# Altium PCB Arduino MEGA blank shield.pcbdoc
Units mm, origin at the board's own origin, x right, y up, seen from the top; angles counter-clockwise.
Board outline 85.09 x 63.34 mm, 2 copper layers (Top Layer, Bottom Layer); 70 components, 89 nets, 224 pads, 0 vias.
Unrouted connection lines stored in the file: 1.
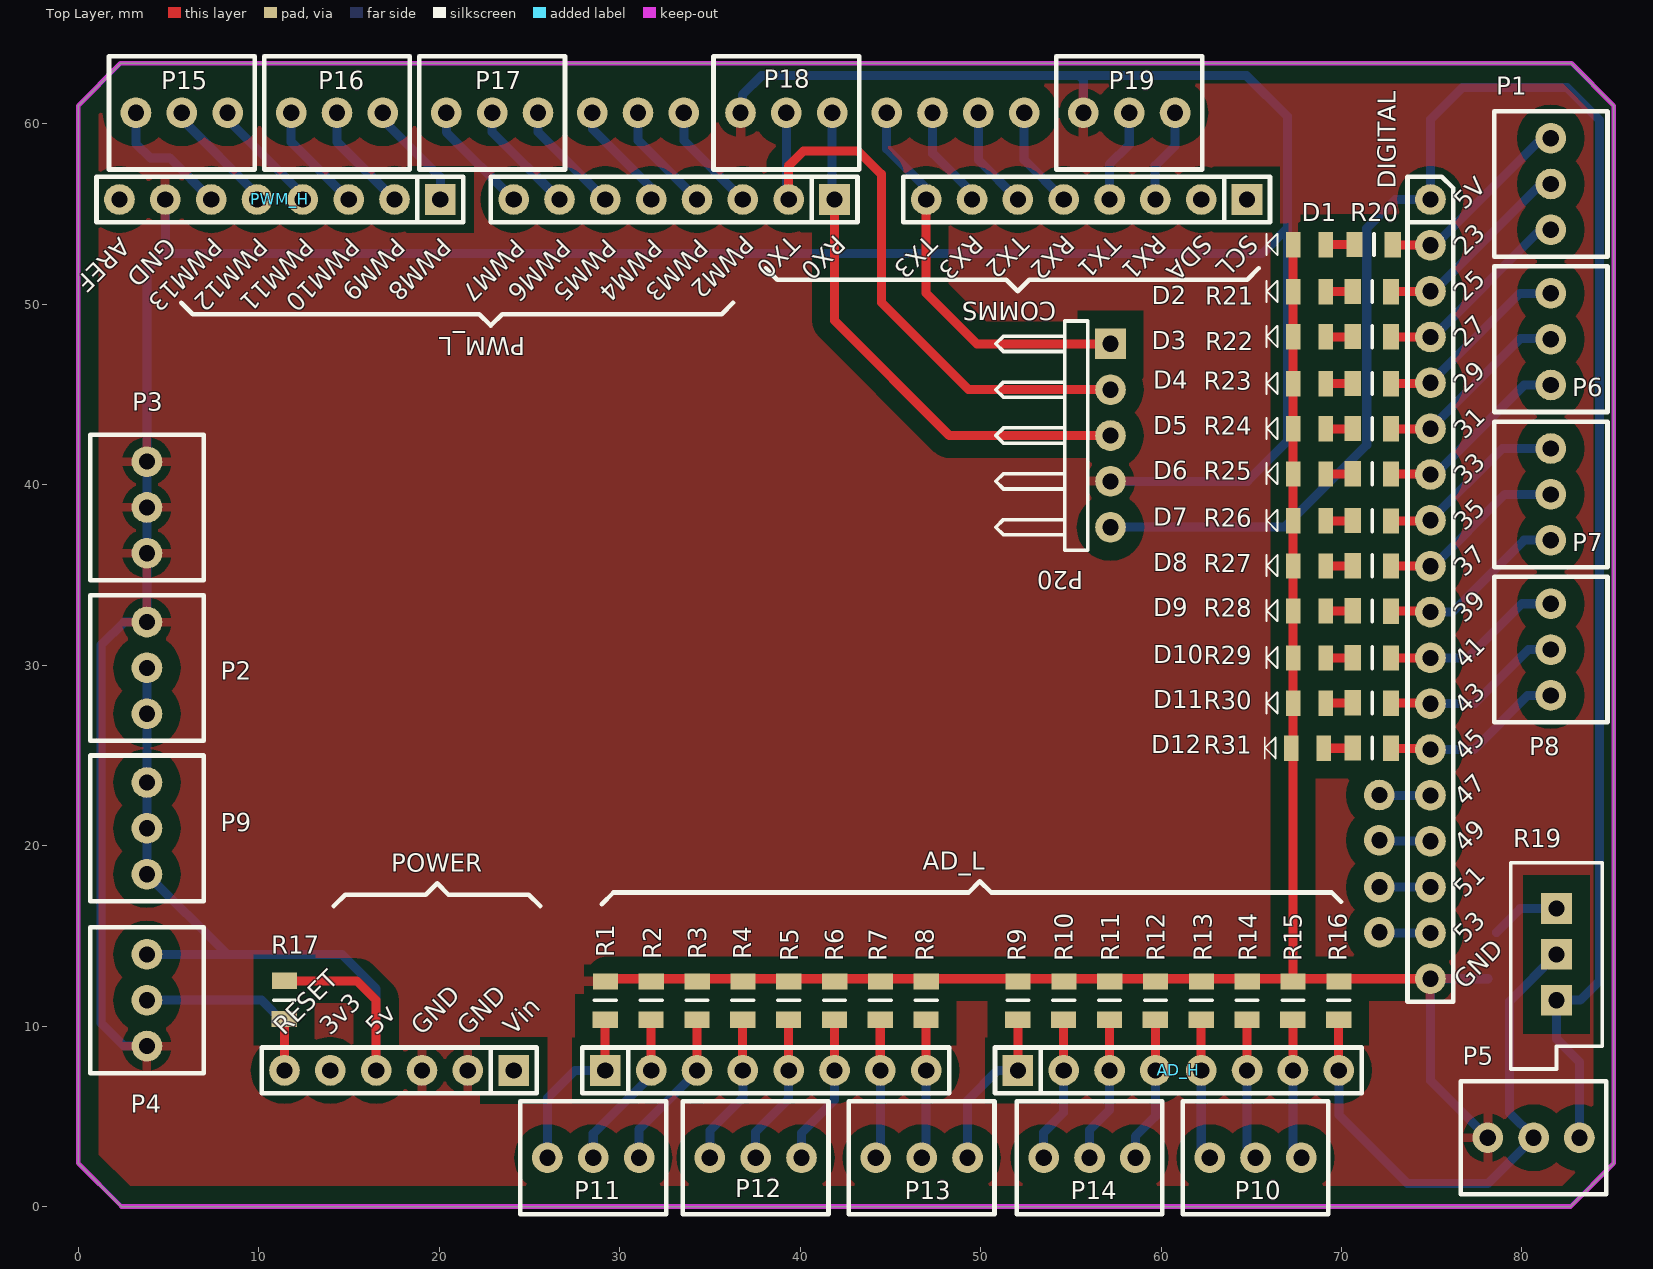
[diagram p0: Top Layer view]
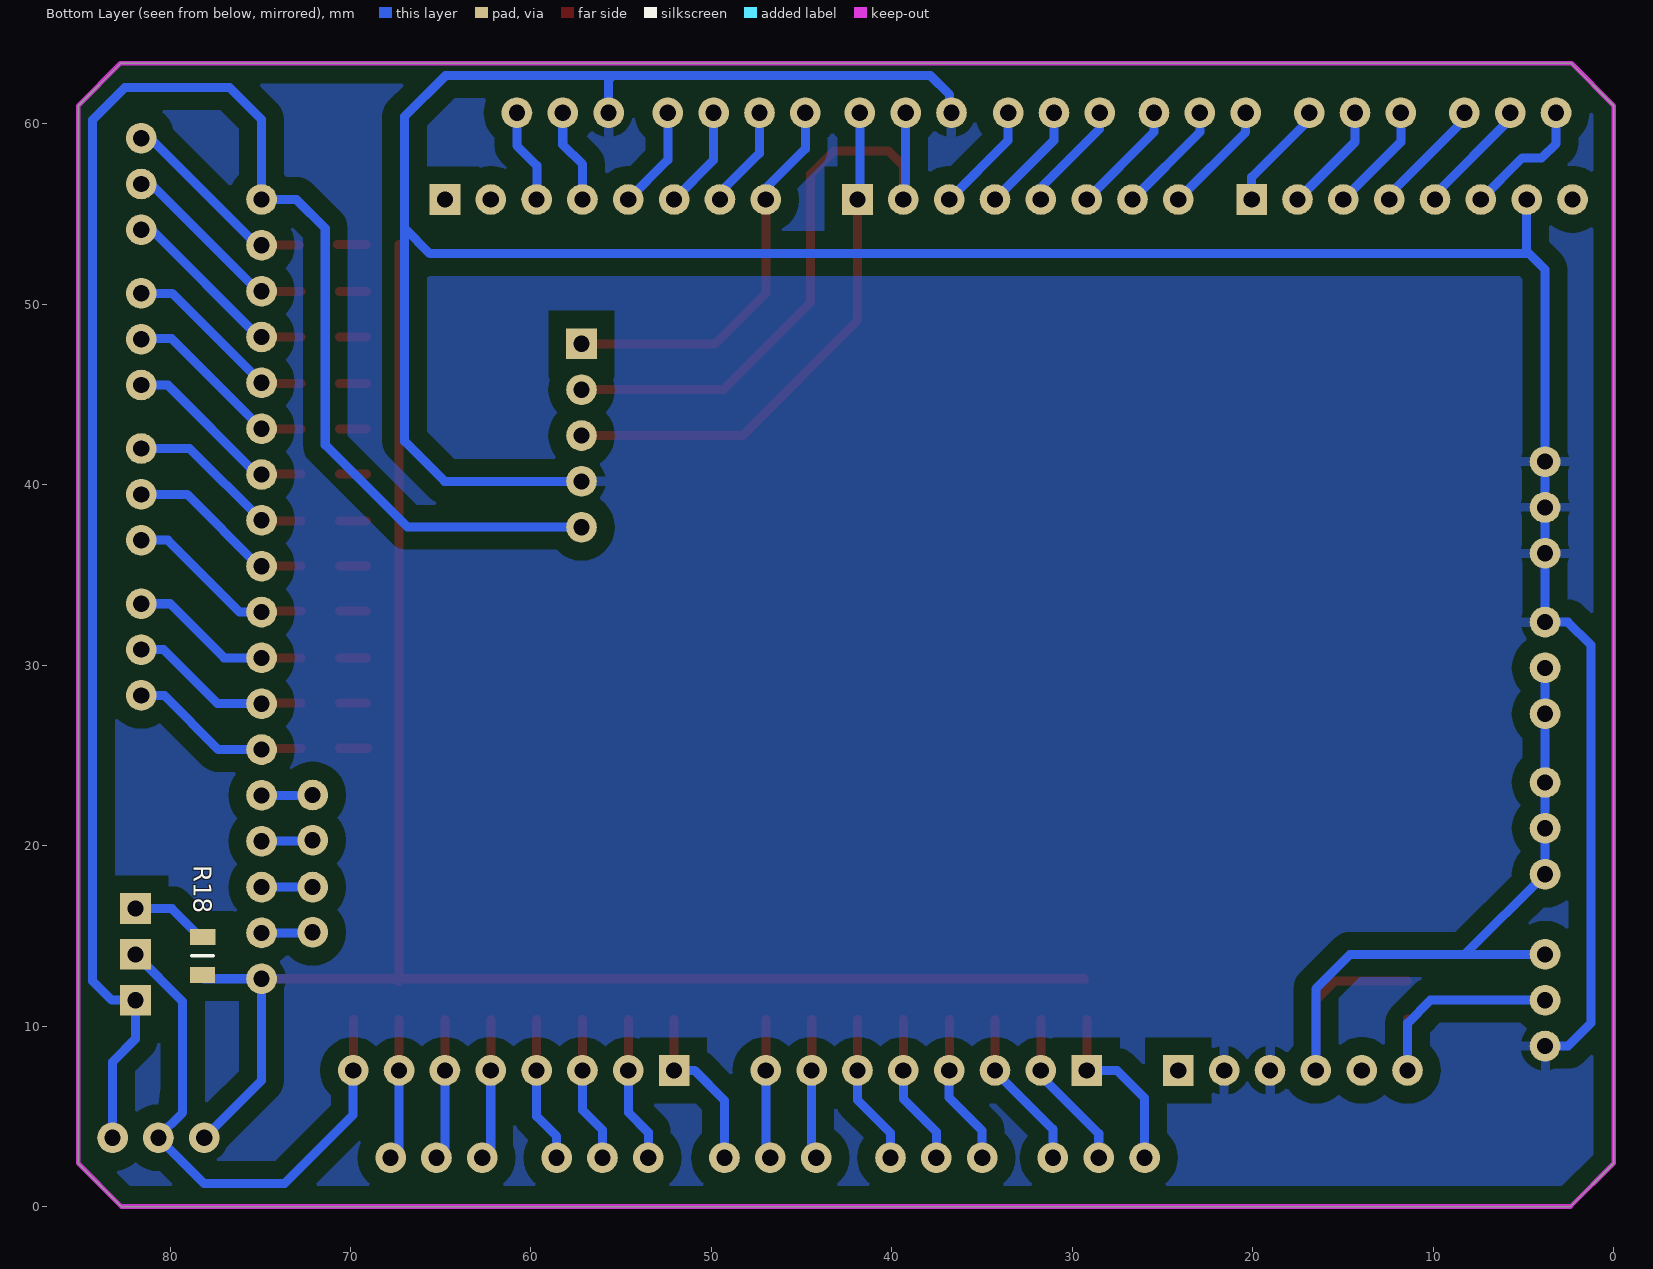
[diagram p1: Bottom Layer view, seen from below]

## Layer stack, top to bottom
Top Solder: solder mask 0.0102, Solder Resist, Dk 3.5
Top Layer: signal copper 0.0356
Dielectric1: dielectric 0.32, FR-4, Dk 4.8
Bottom Layer: signal copper 0.0356
Bottom Solder: solder mask 0.0102, Solder Resist, Dk 3.5

## Board outline
0,2.4 0,61 2.34,63.34 82.75,63.34 85.09,61 85.09,2.39 82.7,0 2.4,0

## Design rules (kind name [scope] priority, off if disabled: settings)
Clearance [All] p1: gap=0.3
PolygonConnect [All] p1: connectstyle=Relief reliefconductorwidth=0.5 reliefentries=4 polygonreliefangle="90 Angle" airgapwidth=0.5
RoutingVias [All] p1: holewidth=0.711 width=1.27 viastyle="Through Hole" minholewidth=0.711 minwidth=1.27 maxholewidth=0.711 maxwidth=1.27
SilkToSolderMaskClearance SilkscreenOverComponentPads [IsPad] p1: minsilkscreentomaskgap=0.254 clearancetoexposedcopper=TRUE
SolderMaskExpansion [All] p1: expansion=0.102
Width [All] p1: maxlimit=0.5 minlimit=0.3 preferedwidth=0.5
28 further rules are at their usual default settings.

## Components (designator, comment, footprint, x,y, rotation, side; value= is the part's Value field where it differs from the comment)
AD_H "AD_H" "HEADER 8X1 8.5MM" 52.07,7.54 r0 top locked
AD_L "AD_L" "HEADER 8X1 8.5MM" 29.21,7.54 r0 top locked
COMMS "Communication" "HEADER 8X1 8.5MM" 64.77,55.8 r180 top
D1 "LED0" LED0805 68.9,53.3 r180 top
D2 "LED0" LED0805 68.9,50.7 r180 top
D3 "LED0" LED0805 68.9,48.2 r180 top
D4 "LED0" LED0805 68.9,45.6 r180 top
D5 "LED0" LED0805 68.9,43.1 r180 top
D6 "LED0" LED0805 68.9,40.6 r180 top
D7 "LED0" LED0805 68.9,38 r180 top
D8 "LED0" LED0805 68.9,35.5 r180 top
D9 "LED0" LED0805 68.9,33 r180 top
D10 "LED0" LED0805 68.9,30.4 r180 top
D11 "LED0" LED0805 68.9,27.9 r180 top
D12 "LED0" LED0805 68.8,25.4 r180 top
DIGITAL "IO_36" "HEADER 36X 8MM" 74.93,55.8 r270 top
P1 "Header 3" DG307-2.54 81.6,59.2 r270 top
P2 "Header 3" DG307-2.54 3.81,27.305 r90 top
P3 "Header 3" DG307-2.54 3.81,41.275 r270 top
P4 "Header 3" DG307-2.54 3.81,13.97 r270 top
P5 "Header 3" DG307-2.54 83.185,3.81 r180 top
P6 "Header 3" DG307-2.54 81.6,50.6 r270 top
P7 "Header 3" DG307-2.54 81.6,42 r270 top
P8 "Header 3" DG307-2.54 81.6,33.4 r270 top
P9 "Header 3" DG307-2.54 3.81,23.495 r270 top
P10 "Header 3" DG307-2.54 62.7,2.7 r0 top
P11 "Header 3" DG307-2.54 26,2.7 r0 top
P12 "Header 3" DG307-2.54 35,2.7 r0 top
P13 "Header 3" DG307-2.54 44.2,2.7 r0 top
P14 "Header 3" DG307-2.54 53.5,2.7 r0 top
P15 "Header 3" DG307-2.54 3.2,60.6 r0 top
P16 "Header 3" DG307-2.54 11.8,60.6 r0 top
P17 "Header 3" DG307-2.54 20.4,60.6 r0 top
P18 "Header 3" DG307-2.54 36.7,60.6 r0 top
P19 "Header 3" DG307-2.54 55.7,60.6 r0 top
P20 "Header 5H" HDR1X5H 57.2,47.8 r270 top
POWER "POWER" "HEADER 6X1 8.5MM" 24.13,7.54 r180 top locked
PWM_H "PWM_H" "HEADER 8X1 8.5MM" 20.066,55.8 r180 top locked
PWM_L "PWM_L" "HEADER 8X1 8.5MM" 41.91,55.8 r180 top locked
R1 "100K" 6-0805_N 29.21,11.43 r270 top
R2 "100K" 6-0805_N 31.75,11.43 r270 top
R3 "100K" 6-0805_N 34.29,11.43 r270 top
R4 "100K" 6-0805_N 36.83,11.43 r270 top
R5 "100K" 6-0805_N 39.37,11.43 r270 top
R6 "100K" 6-0805_N 41.91,11.43 r270 top
R7 "100K" 6-0805_N 44.45,11.43 r270 top
R8 "100K" 6-0805_N 46.99,11.43 r270 top
R9 "100K" 6-0805_N 52.07,11.43 r270 top
R10 "100K" 6-0805_N 54.61,11.43 r270 top
R11 "100K" 6-0805_N 57.15,11.43 r270 top
R12 "100K" 6-0805_N 59.69,11.43 r270 top
R13 "100K" 6-0805_N 62.23,11.43 r270 top
R14 "100K" 6-0805_N 64.77,11.43 r270 top
R15 "100K" 6-0805_N 67.31,11.43 r270 top
R16 "100K" 6-0805_N 69.85,11.43 r270 top
R17 "100K" 6-0805_N 11.43,11.43 r90 top
R18 "0" 6-0805_N 78.2,13.9 r270 bottom
R19 "RPot" VR5 81.915,13.97 r270 top
R20 "1K" 6-0805_N 71.8,53.3 r180 top
R21 "1K" 6-0805_N 71.7,50.7 r180 top
R22 "1K" 6-0805_N 71.7,48.2 r180 top
R23 "1K" 6-0805_N 71.7,45.6 r180 top
R24 "1K" 6-0805_N 71.7,43.1 r180 top
R25 "1K" 6-0805_N 71.7,40.6 r180 top
R26 "1K" 6-0805_N 71.7,38 r180 top
R27 "1K" 6-0805_N 71.7,35.5 r180 top
R28 "1K" 6-0805_N 71.7,33 r180 top
R29 "1K" 6-0805_N 71.7,30.4 r180 top
R30 "1K" 6-0805_N 71.7,27.9 r180 top
R31 "1K" 6-0805_N 71.7,25.4 r180 top

## Footprints (in the part's own frame and the unit in brackets; to place one, negate y for a bottom-side part, rotate by r counter-clockwise, add the part's x,y. Pads: shape width x height; smd on the part's side, far side on the other; paste and mask are expansions set on the pad)
6-0805_N [mm] "Chip Resistor, Body 2.0x1.2mm, IPC Medium Density"
  rect 0.9x1.4 smd: 1(-1.039,0.009) 2(1.078,-0.007)
  silkscreen extent 0,-0.6 0,0.6, body extent -1.07,-0.7 1.07,0.7, height 0.7
DG307-2.54 [mm]
  round 1.7 hole 0.9: 1(0,0) 2(2.54,0) 3(5.08,0)
  silkscreen extent -1.5,-3.14 6.58,3.14
HDR1X5H [mm] "Connector; Header; 5 Position; Right Angle"
  rect 1.7x1.7 hole 0.9: 1(0,0)
  round 1.7 hole 0.9: 2(2.54,0) 3(5.08,0) 4(7.62,0) 5(10.16,0)
  silkscreen extent -1.27,-6.35 11.43,-1.27
"HEADER 6X1 8.5MM" [mm] "Stackable 6 pin header"
  rect 1.7x1.7 hole 0.9: 1(0,0)
  round 1.7 hole 0.9: 2(2.54,0) 3(5.08,0) 4(7.62,0) 5(10.16,0) 6(12.7,0)
  silkscreen extent -1.27,-1.27 13.97,1.27, body extent -1.27,-1.27 13.97,1.27, height 8.5
"HEADER 8X1 8.5MM" [mm] "Stackable 8 pin header"
  rect 1.7x1.7 hole 0.9: 1(0,0)
  round 1.7 hole 0.9: 2(2.54,0) 3(5.08,0) 4(7.62,0) 5(10.16,0) 6(12.7,0) 7(15.24,0) 8(17.78,0)
  silkscreen extent -1.27,-1.27 19.05,1.27, body extent -1.27,-1.27 19.05,1.27, height 8.5
"HEADER 36X 8MM" [mm] "Stackable 10 pin header"
  round 1.7 hole 0.9: 2(0,0) 4(2.54,0) 6(5.08,0) 8(7.62,0) 10(10.16,0) 12(12.7,0) 14(15.24,0) 16(17.78,0) 18(20.32,0) 20(22.86,0) 22(25.4,0) 24(27.94,0) 26(30.48,0) 28(33.02,0) 30(35.56,0) 32(38.1,0) 34(40.64,0) 36(43.18,0)
  silkscreen extent -1.27,-1.27 44.45,1.27
LED0805 [mm] "Chip Resistor, Body 2.0x1.2mm, IPC High Density"
  rect 0.8x1.4 smd: 1(-0.219,0.008) 2(1.578,0.008)
  silkscreen extent 2.45,-0.6 3.05,0.57, body extent -0.43,-0.72 1.78,0.72, height 1.4
VR5 [mm] "Thru-Hole; 3 Leads"
  rect 1.7x1.7 hole 0.9: 1(-2.54,0) 2(0,0) 3(2.54,0)
  silkscreen extent -5.08,-2.54 6.35,2.54

## Part data
D1 D2 D3 D4 D5 D6 D7 D8 D9 D10 D11 D12: "Typical INFRARED GaAs LED"
P1 P2 P3 P4 P5 P6 P7 P8 P9 P10 P11 P12 P13 P14 P15 P16 P17 P18 P19: "Header, 3-Pin"
P20: "Header, 5-Pin, Right Angle"
R1 R2 R3 R4 R5 R6 R7 R8 R9 R10 R11 R12 R13 R14 R15 R16 R17 R18 R20 R21 R22 R23 R24 R25 R26 R27 R28 R29 R30 R31: library part Res2, "Resistor"
R19: "Potentiometer"

## Free pads (board coordinates)
  round 1.7 hole 0.9: 0(28.48,60.6) 0(31.02,60.6) 0(33.56,60.6) 0(44.8,60.6) 0(47.34,60.6) 0(49.88,60.6) 0(52.42,60.6) 0(72.1,15.2) 0(72.1,17.7) 0(72.1,20.3) 0(72.1,22.8)

## Nets (pads, with @x,y where several pads share a name; then routed paths per layer and width w, separated by ;. In a path a pad name is that pad's centre, name@x,y a point inside that pad or via, vN(x,y) a via of type N, cw(c..) or ccw(c..) an arc to the next point about the centre after c; other vN are vias at no path point)
3V3: POWER.5
5V: DIGITAL.2 P2.1 P2.2 P4.1 P5.1 P9.1 P9.2 P9.3 P20.5 POWER.4 R17.2 R19.3 | length 151.4
  Top Layer w0.5: R17.2 15.432,12.508 16.51,11.43 POWER.4
  Bottom Layer w0.5: P4.1 8.255,13.97 ; P2.2 P2.1 P9.1 P9.2 P9.3 8.255,13.97 ; POWER.4 16.51,12.065 14.605,13.97 8.255,13.97 ; P20.5 66.84,37.64 71.4,42.2 71.4,54.2 73,55.8 DIGITAL.2 74.93,60.23 76.7,62 82.5,62 84.3,60.2 84.3,12.5 83.23,11.43 R19.3 81.915,9.285 83.185,8.015 P5.1
AD0: AD_L.1 P11.1 R1.2 | length 10
  Top Layer w0.5: AD_L.1@29.203,7.547 R1.2
  Bottom Layer w0.5: P11.1 26,6 27.54,7.54 AD_L.1
AD1: AD_L.2 P11.2 R2.2 | length 9
  Top Layer w0.5: AD_L.2@31.743,7.547 R2.2
  Bottom Layer w0.5: P11.2 28.54,4.04 31.75,7.25 AD_L.2
AD2: AD_L.3 P11.3 R3.2 | length 9
  Top Layer w0.5: AD_L.3@34.283,7.547 R3.2
  Bottom Layer w0.5: P11.3 31.08,4.28 34.3,7.5 34.3,7.53 AD_L.3
AD3: AD_L.4 P12.1 R4.2 | length 8.4
  Top Layer w0.5: AD_L.4@36.823,7.547 R4.2
  Bottom Layer w0.5: P12.1 35,4.2 36.83,6.03 AD_L.4
AD4: AD_L.5 P12.2 R5.2 | length 8.4
  Top Layer w0.5: AD_L.5@39.363,7.547 R5.2
  Bottom Layer w0.5: P12.2 37.54,4.14 39.37,5.97 AD_L.5
AD5: AD_L.6 P12.3 R6.2 | length 8.4
  Top Layer w0.5: AD_L.6@41.903,7.547 R6.2
  Bottom Layer w0.5: P12.3 40.08,4.08 41.91,5.91 AD_L.6
AD6: AD_L.7 P13.1 R7.2 | length 7.7
  Top Layer w0.5: AD_L.7@44.443,7.547 R7.2
  Bottom Layer w0.5: P13.1 44.45,2.95 AD_L.7
AD7: AD_L.8 P13.2 R8.2 | length 7.7
  Top Layer w0.5: AD_L.8@46.983,7.547 R8.2
  Bottom Layer w0.5: P13.2 46.74,3.04 46.99,3.29 AD_L.8
AD8: AD_H.1 P13.3 R9.2 | length 9.5
  Top Layer w0.5: AD_H.1@52.063,7.547 R9.2
  Bottom Layer w0.5: P13.3 49.28,5.88 50.94,7.54 AD_H.1
AD9: AD_H.2 P14.1 R10.2 | length 8.1
  Top Layer w0.5: AD_H.2@54.603,7.547 R10.2
  Bottom Layer w0.5: P14.1 53.5,4.1 54.61,5.21 AD_H.2
AD10: AD_H.3 P14.2 R11.2 | length 8.1
  Top Layer w0.5: AD_H.3@57.143,7.547 R11.2
  Bottom Layer w0.5: P14.2 56.04,4.24 57.15,5.35 AD_H.3
AD11: AD_H.4 P14.3 R12.2 | length 8.1
  Top Layer w0.5: AD_H.4@59.683,7.547 R12.2
  Bottom Layer w0.5: P14.3 58.58,3.88 59.69,4.99 AD_H.4
AD12: AD_H.5 P10.1 R13.2 | length 8.1
  Top Layer w0.5: AD_H.5@62.223,7.547 R13.2
  Bottom Layer w0.5: AD_H.5 62.23,2.77 62.3,2.7 P10.1
AD13: AD_H.6 P10.2 R14.2 | length 8
  Top Layer w0.5: AD_H.6@64.763,7.547 R14.2
  Bottom Layer w0.5: AD_H.6 64.77,2.93 65,2.7 P10.2
AD14: AD_H.7 P10.3 R15.2 | length 8
  Top Layer w0.5: AD_H.7@67.303,7.547 R15.2
  Bottom Layer w0.5: AD_H.7 67.31,2.89 67.5,2.7 P10.3
AD15: AD_H.8 P5.2 R16.2 R19.2 | length 30.5
  Top Layer w0.5: AD_H.8@69.843,7.547 R16.2
  Bottom Layer w0.5: AD_H.8 69.85,5.08 73.66,1.27 78.105,1.27 P5.2 80.645,3.855 79.3,5.2 79.3,11.355 R19.2
AREF: PWM_H.8
GND: D1.2 D2.2 D3.2 D4.2 D5.2 D6.2 D7.2 D8.2 D9.2 D10.2 D11.2 D12.2 DIGITAL.36 P2.3 P3.1 P3.2 P3.3 P4.3 P5.3 P18.1 P19.1 P20.4 POWER.2 POWER.3 PWM_H.7 R1.1 R2.1 R3.1 R4.1 R5.1 R6.1 R7.1 R8.1 R9.1 R10.1 R11.1 R12.1 R13.1 R14.1 R15.1 R16.1 R18.2 | length 277
  Top Layer w0.254: R1.1 R1.1@29.37,12.62
  Top Layer w0.5: R1.1@29.37,12.62 R15.1@67.322,12.62 ; R15.1@67.322,12.472 R15.1@67.322,12.62 ; D1.2 D2.2 D3.2 D4.2 D5.2 D6.2 D7.2 D8.2 D9.2 D10.2 D11.2 R15.1@67.322,12.62 ; DIGITAL.36 R15.1@67.322,12.62
  Bottom Layer w0.5: P4.3 2.54,8.89 1.27,10.16 1.27,31.115 2.54,32.385 P2.3 P3.3 P3.2 P3.1 3.81,51.91 4.826,52.926 PWM_H.7 ; 4.826,52.8 65.6,52.8 67,54.2 ; P18.1@36.8,60.6 36.8,61.6 37.863,62.663 55.463,62.663 ; P19.1 55.7,62.426 55.463,62.663 ; P20.4 64.78,40.18 67,42.4 67,54.2 ; P5.3 74.93,6.985 DIGITAL.36 R18.2@78.112,12.62 ; 55.463,62.663 64.737,62.663 67,60.4 67,54.2
IO22: 
IO23: DIGITAL.4 P1.1 R20.1 | length 11.2
  Top Layer w0.5: R20.1 74.899,53.291 DIGITAL.4
  Bottom Layer w0.5: DIGITAL.4 75.16,53.26 81.1,59.2 P1.1
IO24: 
IO25: DIGITAL.6 P1.2 R21.1 | length 11.3
  Top Layer w0.5: R21.1 DIGITAL.6@74.901,50.691
  Bottom Layer w0.5: DIGITAL.6 75.12,50.72 81.06,56.66 P1.2
IO26: 
IO27: DIGITAL.8 P1.3 R22.1 | length 11.3
  Top Layer w0.5: R22.1 DIGITAL.8@74.919,48.191
  Bottom Layer w0.5: DIGITAL.8 75.08,48.18 81.02,54.12 P1.3
IO28: 
IO29: DIGITAL.10 P6.1 R23.1 | length 10.9
  Top Layer w0.5: R23.1 DIGITAL.10@74.881,45.591
  Bottom Layer w0.5: DIGITAL.10 79.89,50.6 P6.1
IO30: 
IO31: DIGITAL.12 P6.2 R24.1 | length 10.9
  Top Layer w0.5: R24.1 DIGITAL.12@74.921,43.091
  Bottom Layer w0.5: DIGITAL.12 79.93,48.1 81.56,48.1 P6.2
IO32: 
IO33: DIGITAL.14 P6.3 R25.1 | length 10.9
  Top Layer w0.5: R25.1 DIGITAL.14@74.899,40.591
  Bottom Layer w0.5: DIGITAL.14 75.16,40.56 80.12,45.52 P6.3
IO34: 
IO35: DIGITAL.16 P7.1 R26.1 | length 10.5
  Top Layer w0.5: R26.1 DIGITAL.16@74.901,37.991
  Bottom Layer w0.5: DIGITAL.16 78.91,42 P7.1
IO36: 
IO37: DIGITAL.18 P7.2 R27.1 | length 10.5
  Top Layer w0.5: R27.1 DIGITAL.18@74.919,35.491
  Bottom Layer w0.5: DIGITAL.18 75.08,35.48 79.06,39.46 P7.2
IO38: 
IO39: DIGITAL.20 P7.3 R28.1 | length 10.5
  Top Layer w0.5: R28.1 DIGITAL.20@74.879,32.991
  Bottom Layer w0.5: DIGITAL.20 76.14,32.94 80.12,36.92 P7.3
IO40: 
IO41: DIGITAL.22 P8.1 R29.1 | length 10.1
  Top Layer w0.5: R29.1 DIGITAL.22@74.921,30.391
  Bottom Layer w0.5: DIGITAL.22 77,30.4 80,33.4 P8.1
IO42: 
IO43: DIGITAL.24 P8.2 R30.1 | length 10.1
  Top Layer w0.5: R30.1 DIGITAL.24@74.899,27.891
  Bottom Layer w0.5: DIGITAL.24 77.36,27.86 80.36,30.86 P8.2
IO44: 
IO45: DIGITAL.26 P8.3 R31.1 | length 10
  Top Layer w0.5: R31.1 DIGITAL.26@74.859,25.391
  Bottom Layer w0.5: DIGITAL.26 77.32,25.32 80.32,28.32 P8.3
IO46: 
IO47: DIGITAL.28 pad.0@72.1,22.8 | length 2.8
  Bottom Layer w0.5: pad.0@72.12,22.78 DIGITAL.28
IO48: 
IO49: DIGITAL.30 pad.0@72.1,20.3 | length 2.8
  Bottom Layer w0.5: pad.0@72.16,20.24 DIGITAL.30
IO50: 
IO51: DIGITAL.32 pad.0@72.1,17.7 | length 2.8
  Bottom Layer w0.5: pad.0@72.1,17.7 DIGITAL.32
IO52: 
IO53: DIGITAL.34 pad.0@72.1,15.2 | length 2.8
  Bottom Layer w0.5: pad.0@72.14,15.16 DIGITAL.34
NetD1_1: D1.1 R20.2 | length 1.6
  Top Layer w0.5: D1.1@69.134,53.307 R20.2
NetD2_1: D2.1 R21.2 | length 1.5
  Top Layer w0.5: D2.1 R21.2@70.607,50.692
NetD3_1: D3.1 R22.2 | length 1.5
  Top Layer w0.5: D3.1 R22.2@70.607,48.192
NetD4_1: D4.1 R23.2 | length 1.5
  Top Layer w0.5: D4.1 R23.2@70.607,45.592
NetD5_1: D5.1 R24.2 | length 1.5
  Top Layer w0.5: D5.1 R24.2@70.607,43.092
NetD6_1: D6.1 R25.2 | length 1.5
  Top Layer w0.5: D6.1 R25.2@70.607,40.592
NetD7_1: D7.1 R26.2 | length 1.5
  Top Layer w0.5: D7.1 R26.2@70.607,37.992
NetD8_1: D8.1 R27.2 | length 1.5
  Top Layer w0.5: D8.1 R27.2@70.607,35.492
NetD9_1: D9.1 R28.2 | length 1.5
  Top Layer w0.5: D9.1 R28.2@70.607,32.992
NetD10_1: D10.1 R29.2 | length 1.5
  Top Layer w0.5: D10.1 R29.2@70.607,30.392
NetD11_1: D11.1 R30.2 | length 1.5
  Top Layer w0.5: D11.1 R30.2@70.607,27.892
NetD12_1: D12.1 R31.2 | length 1.6
  Top Layer w0.5: D12.1 R31.2@70.607,25.392
NetR18_1: R18.1 R19.1 | length 3.9
  Bottom Layer w0.5: R18.1@78.596,15.196 79.9,16.5 R19.1@81.915,16.5
PWM2: pad.0@33.56,60.6 PWM_L.3 | length 6.2
  Bottom Layer w0.5: pad.0@33.56,60.6 33.56,59.07 PWM_L.3
PWM3: pad.0@31.02,60.6 PWM_L.4 | length 6.2
  Bottom Layer w0.5: pad.0@31.02,60.6 31.02,59.07 PWM_L.4
PWM4: pad.0@28.48,60.6 PWM_L.5 | length 6
  Bottom Layer w0.5: pad.0@28.5,60.5 28.5,59.7 31.75,56.45 PWM_L.5
PWM5: P17.3 PWM_L.6 | length 6.3
  Bottom Layer w0.5: P17.3 25.48,59.53 PWM_L.6
PWM6: P17.2 PWM_L.7 | length 6.3
  Bottom Layer w0.5: P17.2 22.94,59.53 PWM_L.7
PWM7: P17.1 PWM_L.8 | length 6.3
  Bottom Layer w0.5: P17.1 20.4,59.53 PWM_L.8
PWM8: P16.3 PWM_H.1 | length 6.1
  Bottom Layer w0.5: P16.3 16.88,60.22 20.066,57.034 PWM_H.1
PWM9: P16.2 PWM_H.2 | length 6.1
  Bottom Layer w0.5: P16.2 14.34,58.986 PWM_H.2
PWM10: P16.1 PWM_H.3 | length 6.1
  Bottom Layer w0.5: P16.1 11.8,58.986 PWM_H.3
PWM11: P15.3 PWM_H.4 | length 6.5
  Bottom Layer w0.5: P15.3 8.28,60.22 12.446,56.054 PWM_H.4
PWM12: P15.2 PWM_H.5 | length 6.5
  Bottom Layer w0.5: P15.2 5.74,60.26 9.906,56.094 PWM_H.5
PWM13: P15.1 PWM_H.6 | length 7.2
  Bottom Layer w0.5: P15.1 3.2,58.9 4,58.1 5.066,58.1 PWM_H.6
RESET: P4.2 POWER.6 R17.1 | length 13.6
  Top Layer w0.5: POWER.6@11.421,7.549 R17.1
  Bottom Layer w0.5: P4.2 10.16,11.43 11.43,10.16 POWER.6
RX0: P18.3 P20.3 PWM_L.1 | length 29.4
  Top Layer w0.5: PWM_L.1 41.91,49.09 48.28,42.72 P20.3
  Bottom Layer w0.5: PWM_L.1@41.78,55.83 P18.3
RX1: COMMS.3 P19.3 | length 5.1
  Bottom Layer w0.5: COMMS.3@59.68,55.81 59.68,57.68 60.78,58.78 P19.3@60.78,60.5
RX2: COMMS.5 pad.0@52.42,60.6 | length 5.7
  Bottom Layer w0.5: pad.0@52.42,60.6 52.41,60.59 52.41,58 COMMS.5
RX3: COMMS.7 pad.0@47.34,60.6 | length 5.7
  Bottom Layer w0.5: pad.0@47.34,60.6 47.34,58.36 49.53,56.17 COMMS.7
SCL: COMMS.1
SDA: COMMS.2
TX0: P18.2 P20.2 PWM_L.2 | length 34.5
  Top Layer w0.5: PWM_L.2 39.37,57.67 40.2,58.5 43.2,58.5 44.5,57.2 44.5,50.1 49.34,45.26 P20.2
  Bottom Layer w0.5: PWM_L.2@39.24,55.93 P18.2 P18.2@39.24,60.7
TX1: COMMS.4 P19.2 | length 5.1
  Bottom Layer w0.5: COMMS.4@57.14,55.81 57.14,57.74 58.24,58.84 P19.2@58.24,60.5
TX2: COMMS.6 pad.0@49.88,60.6 | length 5.7
  Bottom Layer w0.5: pad.0@49.88,60.6 49.88,57.99 COMMS.6
TX3: COMMS.8 P20.1 pad.0@44.8,60.6 | length 22.3
  Top Layer w0.5: COMMS.8 46.99,50.61 49.8,47.8 P20.1
  Bottom Layer w0.5: pad.0@44.8,60.6 44.8,58.6 46.99,56.41 COMMS.8
VIN: POWER.1

## Polygon pours and split planes (outlines as drawn)
GND on Top Layer "Bottom Layer-No Net" (solid, pour order 2): 0,61 2.34,63.34 82.75,63.34 85.09,61 85.09,2.39 82.7,0 2.4,0 0,2.4
GND on Bottom Layer "Bottom Layer-No Net" (solid, pour order 4): 0,61 0.06,61 2.4,63.34 82.75,63.34 85.09,61 85.09,2.39 82.7,0 2.4,0 0,2.4

## Keep-outs
Keep-Out Layer:
  the board outline again, w0.254

## Silkscreen, mask and mechanical layers (free items; w line width, h text height)
Top Overlay:
  lines w0.254: 5.715,50.085 6.35,49.45 22.225,49.45 22.86,48.815 23.495,49.45 35.65,49.45 36.285,50.085 ; 14.17,16.65 14.805,17.285 19.25,17.285 19.885,17.92 20.52,17.285 24.965,17.285 25.6,16.65 ; 29.01,16.75 29.66,17.4 49.345,17.4 49.965,18.02 50.585,17.4 69.455,17.4 69.973,16.883 ; 38.1,51.99 38.735,51.355 51.435,51.355 52.07,50.72 52.705,51.355 64.77,51.355 65.405,51.99
  text "5V" at 76.835,55.165 h1 r45
  text "PWM2" at 36.83,53.895 h1 r225
  text "TX0" at 39.37,53.895 h1 r225
  text "RX0" at 41.91,53.895 h1 r225
  text "TX3" at 46.99,53.895 h1 r225
  text "RX3" at 49.53,53.895 h1 r225
  text "TX2" at 52.07,53.895 h1 r225
  text "RX2" at 54.61,53.895 h1 r225
  text "TX1" at 57.15,53.895 h1 r225
  text "RX1" at 59.69,53.895 h1 r225
  text "SDA" at 62.23,53.895 h1 r225
  text "SCL" at 64.77,53.895 h1 r225
  text "AREF" at 2.286,53.768 h1 r225
  text "GND" at 4.826,53.768 h1 r225
  text "PWM13" at 7.366,53.768 h1 r225
  text "PWM12" at 9.906,53.768 h1 r225
  text "PWM11" at 12.446,53.768 h1 r225
  text "PWM10" at 14.986,53.768 h1 r225
  text "PWM9" at 17.526,53.768 h1 r225
  text "PWM8" at 20.066,53.768 h1 r225
  text "PWM7" at 24.13,53.715 h1 r225
  text "PWM6" at 26.67,53.715 h1 r225
  text "PWM5" at 29.21,53.715 h1 r225
  text "PWM4" at 31.75,53.715 h1 r225
  text "PWM3" at 34.29,53.715 h1 r225
  text "23" at 76.835,52.625 h1 r45
  text "25" at 76.835,50.085 h1 r45
  text "27" at 76.835,47.545 h1 r45
  text "29" at 76.835,45.005 h1 r45
  text "31" at 76.835,42.465 h1 r45
  text "33" at 76.835,39.925 h1 r45
  text "35" at 76.835,37.385 h1 r45
  text "37" at 76.835,34.845 h1 r45
  text "39" at 76.835,32.305 h1 r45
  text "41" at 76.835,29.765 h1 r45
  text "43" at 76.835,27.225 h1 r45
  text "45" at 76.835,24.685 h1 r45
  text "47" at 76.835,22.145 h1 r45
  text "49" at 76.835,19.605 h1 r45
  text "51" at 76.835,17.065 h1 r45
  text "53" at 76.835,14.525 h1 r45
  text "GND" at 76.835,11.985 h1 r45
  text "RESET" at 11.43,9.445 h1 r45
  text "3v3" at 13.97,9.445 h1 r45
  text "5v" at 16.51,9.445 h1 r45
  text "GND" at 19.05,9.445 h1 r45
  text "GND" at 21.59,9.445 h1 r45
  text "Vin" at 24.13,9.445 h1 r45